# Altium PCB PCBtest.PcbDoc
Units mil, origin at the board's own origin, x right, y up, seen from the top; angles counter-clockwise.
Board outline 6000 x 4000 mil, 2 copper layers (Top Layer, Bottom Layer), stack 61.756 mil thick; 78 components, 57 nets, 251 pads, 0 vias.
Unrouted connection lines stored in the file: 157.
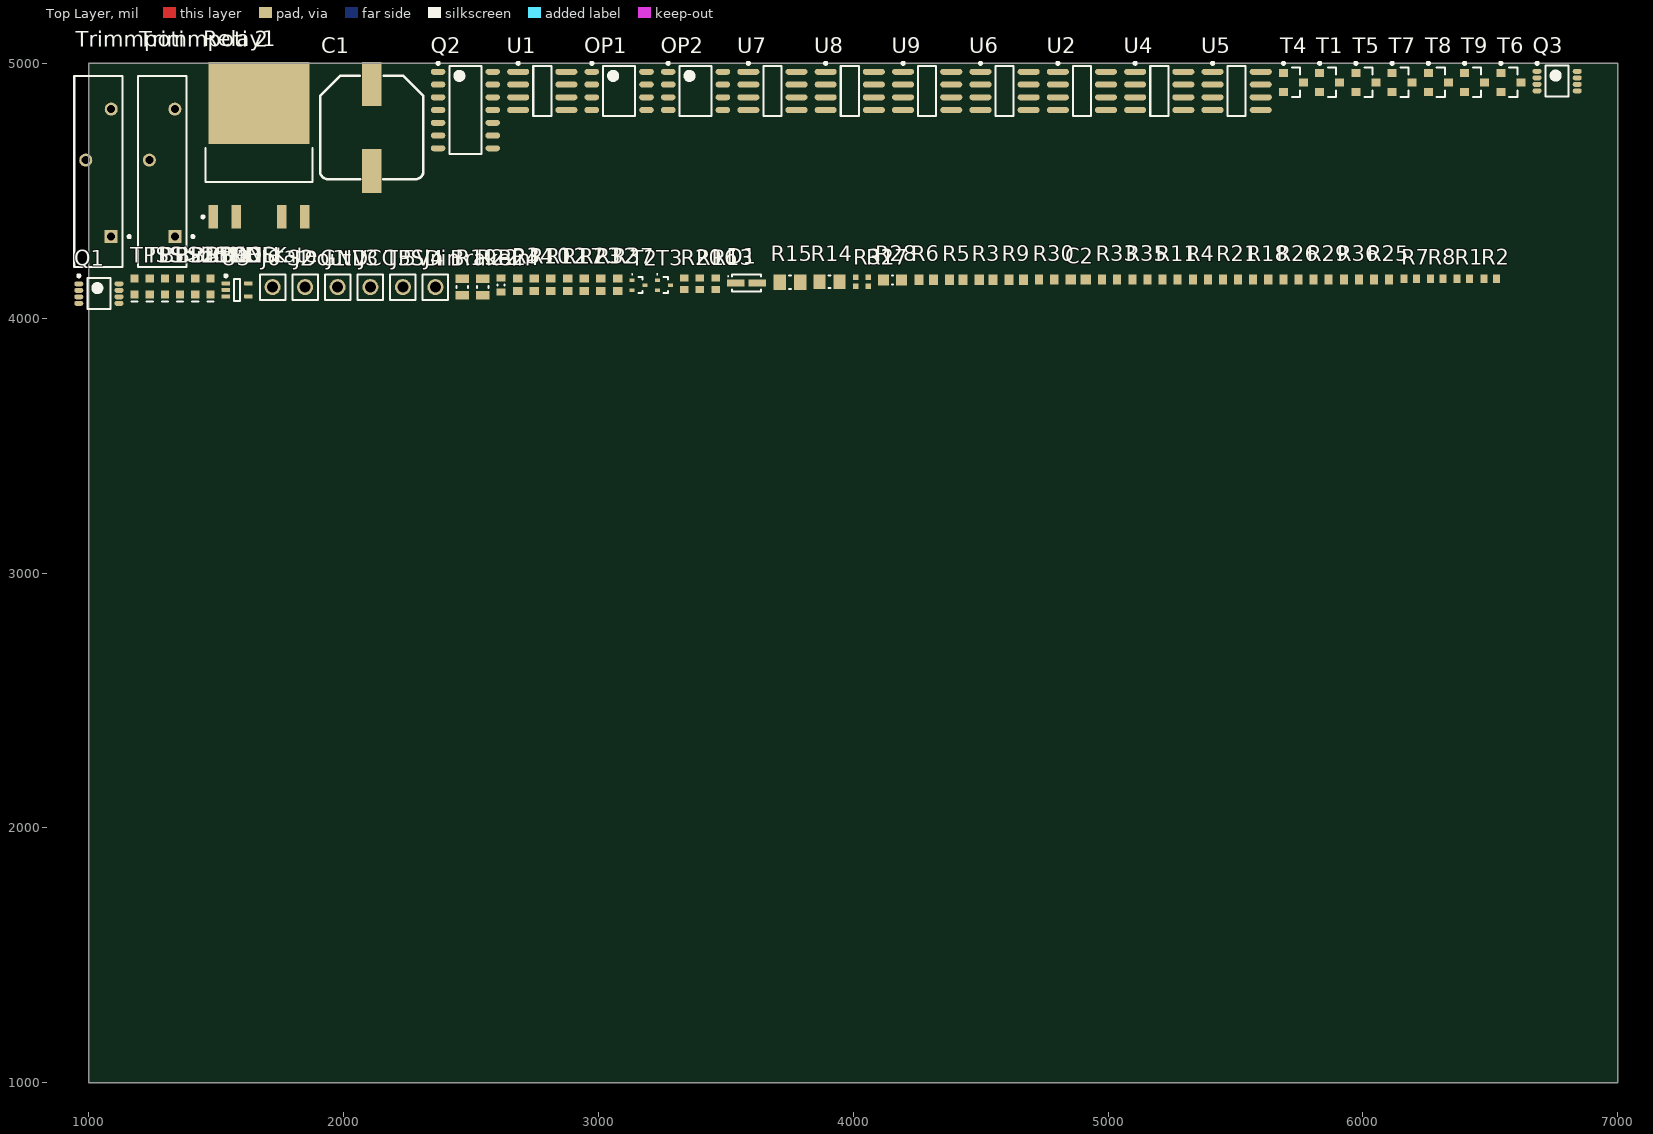
[diagram p0: Top Layer view]
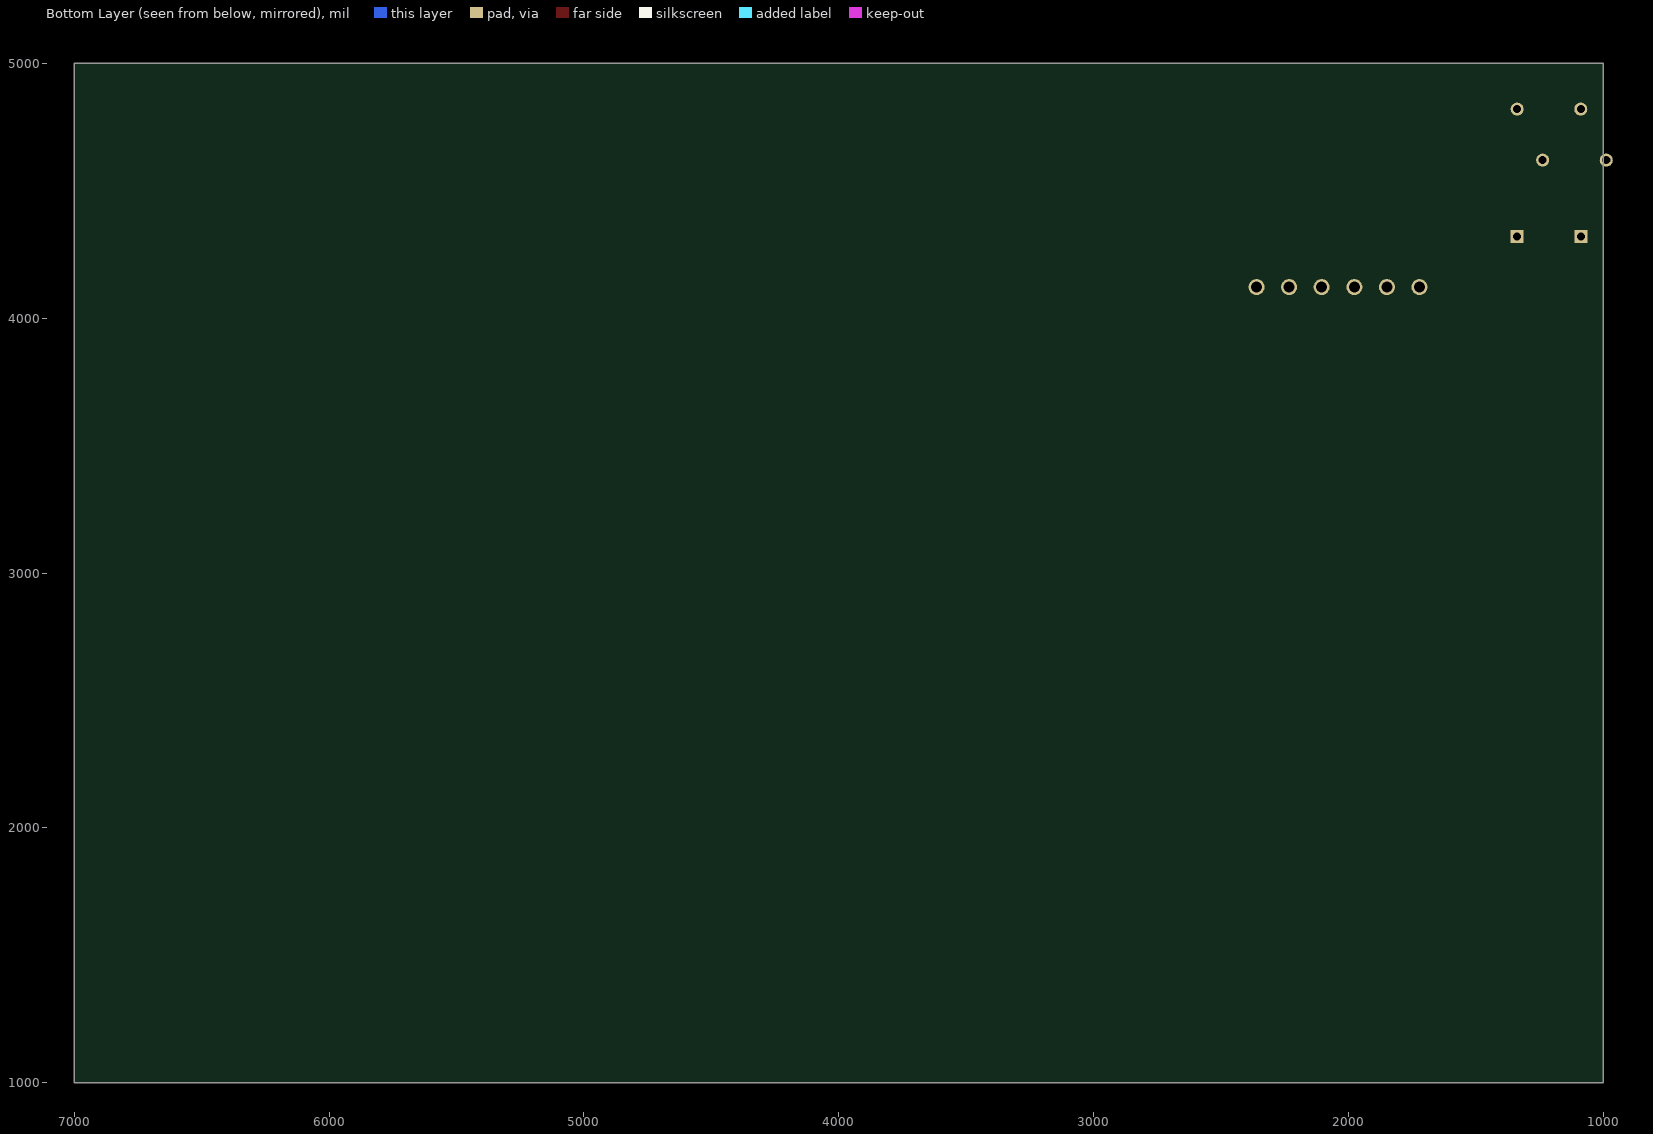
[diagram p1: Bottom Layer view, seen from below]

## Layer stack, top to bottom
Top Solder: solder mask 1, SM-001, Dk 4
Top Layer: signal copper 1.378
Dielectric 1: core 59, Core-043, Dk 4.3
Bottom Layer: signal copper 1.378
Bottom Solder: solder mask 1, SM-001, Dk 4

## Board outline
1000,1000 7000,1000 7000,5000 1000,5000

## Design rules (kind name [scope] priority, off if disabled: settings)
Clearance [All] p1: gap=10 ignorepadtopadclearanceinfootprint=FALSE except(0: Arc-Hole Track-Hole SMDPad-Hole THPad-Hole Via-Hole Fill-Hole Poly-Hole Region-Hole Text-Hole)
PolygonConnect [All] p1: connectstyle=Relief reliefconductorwidth=10 reliefentries=4 polygonreliefangle="90 Angle" airgapwidth=10
RoomDefinition Sheet1 [InComponentClass('Sheet1')] p1: confinementstyle=ConfineIn formatcopy=TRUE lockcomponents=FALSE outline 930,935 7050,935 7050,5030 930,5030
RoutingVias [All] p1: holewidth=28 width=50 viastyle="Through Hole" minholewidth=28 minwidth=50 maxholewidth=28 maxwidth=50
SolderMaskExpansion [All] p1: expansion=4 istentingtop=FALSE
Width [All] p1: maxlimit=10 minlimit=10 preferedwidth=10
30 further rules are at their usual default settings.

## Components (designator, comment, footprint, x,y, rotation, side; value= is the part's Value field where it differs from the comment)
BP>30B "150060GS75000" 0603_A 1359.15,4124.97 r90 top
BPShrtGND "150060RS75000" 0603_A 1299.65,4124.97 r90 top
BSPDCLK "150060BS75000" 0603_A 1418.65,4124.97 r90 top
BSPDState "150060GS75000" 0603_A 1478.14,4124.97 r90 top
C1 "875075561006" WCAP-PSLC_10x12.4 2111.1,4748.13 r90 top value=150uF
C2 "C0603C335M9PACTU" CAPC1608X90X35NL15T15 4882.97,4152.53 r0 top
D1 "BAT46WH" DIOM2715X18N 3581.86,4138.82 r0 top
"J1 VCC 5V" "61300111121" 61300111121 1977.62,4122.28 r90 top
"J2 GND" "61300111121" 61300111121 1849.75,4122.28 r90 top
"J3 TPSin" "61300111121" 61300111121 2105.5,4122.28 r90 top
"J4 BrakeIn" "61300111121" 61300111121 2361.24,4122.28 r90 top
J5SDin "61300111121" 61300111121 2233.37,4122.28 r90 top
"J6 SDout" "61300111121" 61300111121 1721.87,4122.28 r90 top
OP1 "AD711" "SOIC8; SOIC127P600X175-8N" 3081.93,4891.69 r0 top
OP2 "AD711" "SOIC8; SOIC127P600X175-8N" 3381.58,4891.69 r0 top
Q1 "Dual 2 input AND gate" "TSSOP8; TSOP65P400X110-8N" 1040.46,4096.49 r0 top
Q2 "Triple Input OR Gate" "SOIC14; SOIC127P600X175-14N" 2478.68,4816.69 r0 top
Q3 "74LVC1G74" "TSSOP8; TSOP65P400X110-8N" 6762.21,4930.28 r0 top
R1 "ERJ-3EKF1022V" RESC1608X55X30LL15T15 6394.6,4155.48 r0 top
R2 "ERJ-3EKF4753V" RESC1608X55X30LL15T15 6499.38,4155.48 r0 top
R3 "CRCW060325K5FKEA" RESC1609X50X30ML10T20 4521.41,4151.55 r0 top
R4 "RC0603FR-0710KL" RESC1608X55X25ML10T15 5362.09,4152.53 r0 top
R5 "CRCW0603402KFKEA" RESC1609X50X30ML10T20 4404.83,4151.55 r0 top
R6 "ERJ-3EKF2433V" RESC1608X55X30ML15T15 4286.27,4151.55 r0 top
R7 "ERJ-3EKF1022V" RESC1608X55X30LL15T15 6185.06,4155.48 r0 top
R8 "ERJ-3EKF4753V" RESC1608X55X30LL15T15 6289.83,4155.48 r0 top
R9 "ERJ-3EKF2433V" RESC1608X55X30ML15T15 4639.96,4151.55 r0 top
R10 "CRCW060313K0FKEA" RESC1609X50X30NL10T20 2749.02,4131.86 r90 top
R11 "RC0603FR-0710KL" RESC1608X55X25ML10T15 5243.54,4152.53 r0 top
R12 "CRCW0603249KFKEA" RESC1609X50X30NL10T20 2814.42,4131.86 r90 top
R13 "CRCW060330K0FKEA" RESC1609X50X30LL10T20 3460.35,4135.8 r90 top
R14 "RC0805FR-071KL" RESC2013X60X35ML10T20 3907.54,4143.67 r0 top
R15 "CRCW0805510KFKEA" RESC2013X50X30ML20T20 3751.59,4141.7 r0 top
R16 "CRCW060397K6FKEA" RESC1609X50X30LL10T20 3398.89,4135.8 r90 top
R17 "CRCW0603499KFKEA" RESC1609X50X30NL10T20 2879.82,4131.86 r90 top
R18 "RC0603FR-07100KL" RESC1608X55X25ML10T15 5599.2,4152.53 r0 top
R19 "CRCW0805100RFKEA" RESC2013X50X30LL20T20 2465.76,4123 r90 top
R20 "CRCW060397K6FKEA" RESC1609X50X30LL10T20 3337.42,4135.8 r90 top
R21 "RC0603FR-07100KL" RESC1608X55X25ML10T15 5480.64,4152.53 r0 top
R22 "CRCW0805100RFKEA" RESC2013X50X30LL20T20 2546.91,4123 r90 top
R23 "CRCW0603499KFKEA" RESC1609X50X30NL10T20 2945.22,4131.86 r90 top
R24 "51K1 1% 0603(1608)" RESC0603(1608)_L 2619.2,4130.88 r90 top value="51100.00 Ohm"
R25 "RC0603FR-07100KL" RESC1608X55X25ML10T15 6073.4,4152.53 r0 top
R26 "RC0603FR-0710KL" RESC1608X55X25ML10T15 5717.75,4152.53 r0 top
R27 "ERJ-2RKF1243X" RESC1005X40X25NL05T05 4059.02,4143.67 r90 top
R28 "118K 1% 0603(1608)" RESC0603(1608)_M 4154.93,4150.56 r0 top value="118000.00 Ohm"
R29 "RC0603FR-07100KL" RESC1608X55X25ML10T15 5836.3,4152.53 r0 top
R30 "RC0603FR-0710KL" RESC1608X55X25ML10T15 4759.5,4152.53 r0 top
R31 "ERJ-2RKF1243X" RESC1005X40X25NL05T05 4009.36,4143.67 r90 top
R32 "CRCW0603130KFKEA" RESC1609X50X30NL10T20 3010.62,4131.86 r90 top
R33 "RC0603FR-07100RL" RESC1608X55X25ML10T15 5006.44,4152.53 r0 top
R34 "CRCW0603130KFKEA" RESC1609X50X30NL10T20 2683.61,4131.86 r90 top
R35 "RC0603FR-07100RL" RESC1608X55X25ML10T15 5124.99,4152.53 r0 top
R36 "RC0603FR-07100RL" RESC1608X55X25ML10T15 5954.85,4152.53 r0 top
R37 "CRCW0603130KFKEA" RESC1609X50X30NL10T20 3076.02,4131.86 r90 top
Relay1 "AUIR3313S" "D2PAK5 ;DPAK228P1524X483-5N" 1668.78,4679.23 r90 top
T1 "BC848BLT1G" ONSC-SOT-23-3-318-08_V 5869.8,4925.35 r0 top
T2 "MMBT3906TT1G" ONSC-SC-75-3-463-01_V 3158.22,4129.84 r0 top
T3 "MMBT3906TT1G" ONSC-SC-75-3-463-01_V 3257.2,4129.84 r0 top
T4 "BC848BLT1G" ONSC-SOT-23-3-318-08_V 5727.63,4925.35 r0 top
T5 "BC848BLT1G" ONSC-SOT-23-3-318-08_V 6011.98,4925.35 r0 top
T6 "BC848BLT1G" ONSC-SOT-23-3-318-08_V 6580.67,4925.35 r0 top
T7 "BC848BLT1G" ONSC-SOT-23-3-318-08_V 6154.15,4925.35 r0 top
T8 "BC848BLT1G" ONSC-SOT-23-3-318-08_V 6296.32,4925.35 r0 top
T9 "BC848BLT1G" ONSC-SOT-23-3-318-08_V 6438.5,4925.35 r0 top
TPS>25% "150060GS75000" 0603_A 1240.16,4124.97 r90 top
TPSShrtGND "150060RS75000" 0603_A 1180.66,4124.97 r90 top
Trimmpoti "3006P-1-104ZLF" BOUR-3006P-3_V 1039.02,4575.15 r90 top
"Trimmpoti 2" "3006P-1-104ZLF" BOUR-3006P-3_V 1288.54,4575.15 r90 top
U1 "LT1017IS8#PBF" LT-S8_N 2780.31,4891.69 r0 top
U2 "LT1017IS8#PBF" LT-S8_N 4897.57,4891.69 r0 top
U3 "Inverter SN74LVC1G04DCKR" DCK0005A_N 1582.91,4111.26 r0 top
U4 "LT1017IS8#PBF" LT-S8_N 5201.16,4891.69 r0 top
U5 "LT1017IS8#PBF" LT-S8_N 5504.75,4891.69 r0 top
U6 "LT1017IS8#PBF" LT-S8_N 4593.98,4891.69 r0 top
U7 "LT1017IS8#PBF" LT-S8_N 3683.2,4891.69 r0 top
U8 "LT1017IS8#PBF" LT-S8_N 3986.8,4891.69 r0 top
U9 "LT1017IS8#PBF" LT-S8_N 4290.39,4891.69 r0 top

## Footprints (in the part's own frame and the unit in brackets; to place one, negate y for a bottom-side part, rotate by r counter-clockwise, add the part's x,y. Pads: shape width x height; smd on the part's side, far side on the other; paste and mask are expansions set on the pad)
0603_A [mm] "Chip LED, 2-Leads, Body 1.6x0.8mm, IPC Medium Density"
  rect 0.8x0.8 smd: 1(-0.8,0) 2(0.8,0)
  silkscreen extent -1.5,-0.3 -1.5,0.3, body extent -0.8,-0.4 0.8,0.4, height 0.7
61300111121 [mm] "1pins, 1 row, straight, gold plating"
  round 1.6 hole 1.1: 1(0,0)
  silkscreen extent -1.27,-1.27 1.27,1.27, body extent -1.27,-1.27 1.27,1.27, height 8.57
BOUR-3006P-3_V [mm] "THD, 3-Leads, Body 19.05x4.83mm, Height 6.6mm"
  rect 1.3x1.3 hole 0.8: 1(-6.475,-1.27)
  round 1.3 hole 0.8: 2(1.145,1.27) 3(6.225,-1.27)
  silkscreen extent -9.53,-3.19 9.53,2.41, body extent -9.53,-2.41 11.05,2.41, height 6.6
CAPC1608X90X35NL15T15 [mm] "Chip Capacitor, 2-Leads, Body 1.60x0.81mm, IPC Medium Density"
  rect 1.05x1 smd: 1(-0.75,0) 2(0.75,0)
  body extent -0.88,-0.48 0.87,0.48, height 0.9
"D2PAK5 ;DPAK228P1524X483-5N" [mm] "D2-PAK, 5-Pads, Body 7,93x8,70mm (max), IPC Medium Density"
  rect 2.35x0.95 smd: 1(-7.15,4.56) 2(-7.15,2.28) 4(-7.15,-2.28) 5(-7.15,-4.56)
  rect 8.2x10.1 smd: 3(4.2,0)
  silkscreen extent -7.27,-5.35 -0.3,5.71, body extent -7.51,-5.33 7.74,5.33, height 4.83
DCK0005A_N [mm] "SOT23, 5-Leads, Body 2.15x1.4mm, Pitch 0.65mm, IPC Medium Density"
  rrect25% 0.85x0.4 smd: 1(-1.125,0.65) 2(-1.125,0) 3(-1.125,-0.65) 4(1.125,-0.65) 5(1.125,0.65)
  silkscreen extent -1.25,-1.1 0.3,1.52, body extent -1.14,-1 1.14,1, height 0.94
DIOM2715X18N [mm] "Molded Diode, 2-Leads, Body 2,70x1,55mm, IPC Medium Density"
  rect 1.75x0.7 smd: 1(-1.075,0) 2(1.075,0)
  silkscreen extent -1.9,-0.85 1.45,0.85, body extent -1.65,-0.85 1.65,0.85, height 1.8
LT-S8_N [mm] "SOP, 8-Leads, Body 4.9x3.9mm, Pitch 1.27mm, IPC Medium Density"
  oval 2.2x0.6 smd: 1(-2.4,1.905) 2(-2.4,0.635) 3(-2.4,-0.635) 4(-2.4,-1.905) 5(2.4,-1.905) 6(2.4,-0.635) 7(2.4,0.635) 8(2.4,1.905)
  silkscreen extent -2.52,-2.5 0.9,2.88, body extent -2,-2.5 2,2.5, height 1.76
ONSC-SC-75-3-463-01_V [mil] "SOT23, 3-Leads, Body 1.6x0.8mm, Pitch 0.5mm"
  rect 20x14.02 smd: 1(-25.49,19.68) 2(-25.49,-19.69) 3(25.49,0)
  silkscreen extent -27,-31 16,44, body extent -16,-31 16,31, height 35
ONSC-SOT-23-3-318-08_V [mm] "SOT23, 3-Leads, Body 2.92x1.3mm, Pitch 0.95mm"
  rect 0.9x0.8 smd: 1(-1,0.95) 2(-1,-0.95) 3(1,0)
  silkscreen extent -1.12,-1.46 0.65,2.02, body extent -0.65,-1.46 0.65,1.46, height 1.11
RESC0603(1608)_L [mm] "Chip Resistor, Body 1.6x0.8mm, IPC High Density"
  rect 0.7x0.9 smd: 1(-0.7,0) 2(0.7,0)
  silkscreen extent -0.05,-0.35 0.05,0.35, body extent -0.85,-0.47 0.85,0.47, height 0.6
RESC0603(1608)_M [mm] "Chip Resistor, Body 1.6x0.8mm, IPC Low Density"
  rect 1.1x1.1 smd: 1(-0.9,0) 2(0.9,0)
  silkscreen extent -0.05,-0.45 0.05,0.45, body extent -0.85,-0.47 0.85,0.47, height 0.6
RESC1005X40X25NL05T05 [mm] "Chip Resistor, 2-Leads, Body 1.00x0.50mm, IPC Medium Density"
  rect 0.55x0.55 smd: 1(-0.45,0) 2(0.45,0)
  body extent -0.53,-0.27 0.53,0.28, height 0.4
RESC1608X55X25ML10T15 [mm] "Chip Resistor, 2-Leads, Body 1.60x0.80mm, IPC Low Density"
  rect 0.8x1 smd: 1(-0.75,0) 2(0.75,0)
  body extent -0.85,-0.45 0.85,0.45, height 0.55
RESC1608X55X30LL15T15 [mm] "Chip Resistor, 2-Leads, Body 1.60x0.80mm, IPC High Density"
  rect 0.7x0.85 smd: 1(-0.625,0) 2(0.625,0)
  body extent -0.87,-0.48 0.87,0.48, height 0.55
RESC1608X55X30ML15T15 [mm] "Chip Resistor, 2-Leads, Body 1.60x0.80mm, IPC Low Density"
  rect 0.9x1.05 smd: 1(-0.725,0) 2(0.725,0)
  body extent -0.87,-0.48 0.87,0.48, height 0.55
RESC1609X50X30LL10T20 [mm] "Chip Resistor, 2-Leads, Body 1.55x0.85mm, IPC High Density"
  rect 0.7x0.85 smd: 1(-0.575,0) 2(0.575,0)
  body extent -0.82,-0.48 0.82,0.48, height 0.5
RESC1609X50X30ML10T20 [mm] "Chip Resistor, 2-Leads, Body 1.55x0.85mm, IPC Low Density"
  rect 0.9x1.05 smd: 1(-0.675,0) 2(0.675,0)
  body extent -0.82,-0.48 0.82,0.48, height 0.5
RESC1609X50X30NL10T20 [mm] "Chip Resistor, 2-Leads, Body 1.55x0.85mm, IPC Medium Density"
  rect 0.8x0.95 smd: 1(-0.625,0) 2(0.625,0)
  body extent -0.82,-0.48 0.82,0.48, height 0.5
RESC2013X50X30LL20T20 [mm] "Chip Resistor, 2-Leads, Body 2.00x1.25mm, IPC High Density"
  rect 0.85x1.35 smd: 1(-0.825,0) 2(0.825,0)
  silkscreen extent -0.1,-0.58 0.1,0.58, body extent -1.1,-0.72 1.1,0.72, height 0.5
RESC2013X50X30ML20T20 [mm] "Chip Resistor, 2-Leads, Body 2.00x1.25mm, IPC Low Density"
  rect 1.25x1.55 smd: 1(-1.025,0) 2(1.025,0)
  silkscreen extent -0.1,-0.67 0.1,0.67, body extent -1.1,-0.72 1.1,0.72, height 0.5
RESC2013X60X35ML10T20 [mm] "Chip Resistor, 2-Leads, Body 2.1x1.35mm, IPC Low Density"
  rect 1.2x1.45 smd: 1(-1,0) 2(1,0)
  silkscreen extent -0.1,-0.63 0.1,0.63, body extent -1.05,-0.68 1.05,0.67, height 0.6
"SOIC8; SOIC127P600X175-8N" [mm] "SOIC, 8-Leads, Body 4,90x3,90mm, Pitch 1,27mm, IPC Medium Density"
  oval 1.45x0.6 smd: 1(-2.725,1.905) 2(-2.725,0.635) 3(-2.725,-0.635) 4(-2.725,-1.905) 5(2.725,-1.905) 6(2.725,-0.635) 7(2.725,0.635) 8(2.725,1.905)
  silkscreen extent -2.85,-2.5 1.6,2.88, body extent -2,-2.5 2,2.5, height 1.75
"SOIC14; SOIC127P600X175-14N" [mm] "SOIC, 14-Leads, Body 8,65x3,90mm, Pitch 1,27mm, IPC Medium Density"
  oval 1.45x0.6 smd: 1(-2.725,3.81) 2(-2.725,2.54) 3(-2.725,1.27) 4(-2.725,0) 5(-2.725,-1.27) 6(-2.725,-2.54) 7(-2.725,-3.81) 8(2.725,-3.81) 9(2.725,-2.54) 10(2.725,-1.27) 11(2.725,0) 12(2.725,1.27) 13(2.725,2.54) 14(2.725,3.81)
  silkscreen extent -2.85,-4.4 1.6,4.78, body extent -3,-4.4 3,4.4, height 1.75
"TSSOP8; TSOP65P400X110-8N" [mm] "TSOP, 8-Leads, Body 3,00x3,00mm, Pitch 0,65mm, IPC Medium Density"
  oval 0.9x0.5 smd: 1(-2,0.975) 2(-2,0.325) 3(-2,-0.325) 4(-2,-0.975) 5(2,-0.975) 6(2,-0.325) 7(2,0.325) 8(2,0.975)
  silkscreen extent -2.12,-1.55 1.15,1.9, body extent -1.55,-1.55 1.55,1.55, height 1.1
WCAP-PSLC_10x12.4 [mm] "Aluminium Polymer V-Chip SMT Capacitors, §¶10x12.4mm"
  rect 4.4x1.9 smd: 1(4.35,0) 2(-4.35,0)
  silkscreen extent -5.15,-5.15 5.15,5.15, body extent -5.5,-5.15 5.5,5.15, height 12.4

## Part data
BP>30B BSPDState TPS>25%: library part CMP-1426-00002-1, "SMD mono-color Chip LED, WL-SMCW, Green", Color=Green, Manufacturer="Wuerth Elektronik", ComponentLink1Description="Manufacturer URL", ComponentLink1URL=http://www.we-online.com, ComponentLink2Description=Datasheet, ComponentLink2URL=http://katalog.we-online.com/led/datasheet/150060GS75000.pdf, PackageReference=0603_A, PartNumber=150060GS75000
BPShrtGND TPSShrtGND: library part CMP-1426-00001-1, "SMD mono-color Chip LED, WL-SMCW, Red", Color=Red, Manufacturer="Wuerth Elektronik", ComponentLink1Description="Manufacturer URL", ComponentLink1URL=http://www.we-online.com, ComponentLink2Description=Datasheet, ComponentLink2URL=http://katalog.we-online.com/led/datasheet/150060RS75000.pdf, PackageReference=0603_A, PartNumber=150060RS75000
BSPDCLK: library part CMP-1426-00003-1, "SMD mono-color Chip LED, WL-SMCW, Blue", Color=Blue, Manufacturer="Wuerth Elektronik", ComponentLink1Description="Manufacturer URL", ComponentLink1URL=http://www.we-online.com, ComponentLink2Description=Datasheet, ComponentLink2URL=http://katalog.we-online.com/led/datasheet/150060BS75000.pdf, PackageReference=0603_A, PartNumber=150060BS75000
C1: "WCAP-PSLC Aluminum Polymer Capacitors, size Ф10x12.4mm, 25V DC, 150uF", Operating Temperature="-55 °C up to +105 °C", Rated Voltage="25V DC", ComponentLink1Description=Manufacturer, ComponentLink1URL=http://www.we-online.de, ComponentLink2Description=Datasheet, ComponentLink2URL=http://katalog.we-online.de/pbs/datasheet/875075561006.pdf, Life Cycle=2000h, Part Number=875075561006, Published Date="June 2017", Publisher="Wurth Elektronik", Size=Ф10x12.4mm
C2: library part CMP-2006-02261-1, Manufacturer=Kemet, Part Number=C0603C335M9PACTU
"J1 VCC 5V" "J2 GND" "J3 TPSin" "J4 BrakeIn" J5SDin "J6 SDout": "WR-PHD 2.54 mm THT Pin Header, 1p", Rated Current="3 A", Withstanding Voltage="500 VAC", Working Voltage="250 VAC", ComponentLink1Description=Manufacturer, ComponentLink1URL=http://www.we-online.de, ComponentLink2Description=Datasheet, ComponentLink2URL=http://katalog.we-online.de/em/datasheet/6130xx11121.pdf, Part Number=61300111121, Pin Number=1, Pitch="2.54 mm", Published Date="Aug 2017", Publisher="Wurth Elektronik"
OP1 OP2: Supplier Part Number 1=584-AD711JRZ, Supplier 1=Mouser
Q1: library part 74LVC2G08-Q100, Supplier Part Number 1=771-74LVC2G08DP-G, Supplier 1=Mouser
Q2: library part 74HCT4075D,653, Supplier Part Number 1=771-74HCT4075D-T, Supplier 1=Mouser
Q3: Supplier Part Number 1=771-LVC1GDP125, Supplier 1=Mouser
R1 R7: library part CMP-2000-00185-1, Manufacturer=Panasonic, Part Number=ERJ-3EKF1022V
R2 R8: library part CMP-2000-00528-1, Manufacturer=Panasonic, Part Number=ERJ-3EKF4753V
R3: library part CMP-2000-03129-1, Manufacturer="Vishay Dale", Part Number=CRCW060325K5FKEA
R4 R11 R26 R30: library part CMP-2100-03664-1, "Chip Resistor, 10 KOhm, +/- 1%, 01 W, -55 to 155 degC, 0603 (1608 Metric), RoHS, Tape and Reel", Case Code (Imperial)=0603, Case Code (Metric)=1608, Manufacturer=Yageo, Max Operating Temperature=155degC, Min Operating Temperature=-55degC, Package Description="2-Pin Surface Mount Device, Body 1.6 x 0.8 mm", Power Rating=100mW, Resistance=10KOhm, Temperature Coefficient=100ppm/degreesC, Tolerance=1%, Voltage Rating=75V, Voltage Rating (DC)=50V, Case/Package=0603, Composition=ThickFilm, Datasheet URL=http://www.yageo.com/NewPortal/yageodocoutput?fileName=/pdf/R-Chip/PYu-RC_Group_51_RoHS_L_5.pdf, Datasheet Version="Rev. 5, 10/2016", Depth=0.8mm, Height=0.45mm, Lead Free=LeadFree, Lead Pitch=0.3mm, Length=1.6mm, Manufacturer URL=http://www.yageo.com/, Military Standard=Not, Number of Pins=2, Package Reference=0603, Packaging=TapeandReel, REACH SVHC=NoSVHC, RoHSCompliant=true, Termination=SMD/SMT, Weight=7.1E-05oz, Width=0.8mm
R5: library part CMP-2000-03334-1, Manufacturer="Vishay Dale", Part Number=CRCW0603402KFKEA
R6 R9: library part CMP-2000-00367-1, Manufacturer=Panasonic, Part Number=ERJ-3EKF2433V
R10: library part CMP-2000-03895-1, Manufacturer="Vishay Dale", Part Number=CRCW060313K0FKEA
R12: library part CMP-2000-03115-1, Manufacturer="Vishay Dale", Part Number=CRCW0603249KFKEA
R13: library part CMP-2000-03223-1, Manufacturer="Vishay Dale", Part Number=CRCW060330K0FKEA
R14: library part CMP-2100-03671-1, "Chip Resistor, 1 KOhm, +/- 1%, 125 mW, -55 to 155 degC, 0805 (2012 Metric), RoHS, Tape and Reel", Case Code (Imperial)=0805, Case Code (Metric)=2012, Manufacturer=Yageo, Max Operating Temperature=155degC, Max Power Dissipation=125mW, Min Operating Temperature=-55degC, Package Description="2-Pin Surface Mounted Device, Body 2 x 1.25 mm", Package Quantity=1, Resistance=1KOhm, Temperature Coefficient=100ppm/degreesC, Tolerance=1%, Voltage Rating=150V, Case/Package=0805, Composition=ThickFilm, Datasheet URL=http://www.yageo.com/NewPortal/yageodocoutput?fileName=/pdf/R-Chip/PYu-RC_Group_51_RoHS_L_5.pdf, Datasheet Version="Rev. 5, 10/2016", Depth=1.25mm, Height=0.024inch, Lead Free=LeadFree, Length=0.079inch, Manufacturer URL=http://www.yageo.com/, Military Standard=Not, Number of Pins=2, Number of Terminations=2, Package Reference=0805, Packaging=TapeandReel, Power Rating=125mW, REACH SVHC=Unknown, RoHSCompliant=true, Termination=SMD/SMT, Voltage Rating (DC)=150V, Width=0.049inch
R15: library part CMP-2001-03987-1, Manufacturer="Vishay Dale", Part Number=CRCW0805510KFKEA
R16 R20: library part CMP-2000-03650-1, Manufacturer="Vishay Dale", Part Number=CRCW060397K6FKEA
R17 R23: library part CMP-2000-03389-1, Manufacturer="Vishay Dale", Part Number=CRCW0603499KFKEA
R18 R21 R25 R29: library part CMP-2100-03662-1, "Chip Resistor, 100 KOhm, +/- 1%, 0.1 W, -55 to 155 degC, 0603 (1608 Metric), RoHS, Tape and Reel", Case Code (Imperial)=0603, Case Code (Metric)=1608, Manufacturer=Yageo, Max Operating Temperature=155degC, Min Operating Temperature=-55degC, Package Description="2-Pin Surface Mount Device, Body 1.6 x 0.8 mm", Power Rating=100mW, Resistance=100KOhm, Temperature Coefficient=100ppm/degreesC, Tolerance=1%, Voltage Rating=50V, Case/Package=0603, Composition=ThickFilm, Datasheet URL=http://www.yageo.com/NewPortal/yageodocoutput?fileName=/pdf/R-Chip/PYu-RC_Group_51_RoHS_L_5.pdf, Datasheet Version="Rev. 5, 10/2016", Depth=0.8mm, Height=0.45mm, Lead Free=LeadFree, Length=1.6mm, Manufacturer URL=http://www.yageo.com/, Military Standard=Not, Number of Pins=2, Package Reference=0603, Packaging=TapeandReel, REACH SVHC=NoSVHC, RoHSCompliant=true, Termination=SMD/SMT, Voltage Rating (DC)=50V, Width=0.8mm
R19 R22: library part CMP-2001-04901-1, Manufacturer="Vishay Dale", Part Number=CRCW0805100RFKEA
R24: library part CMP-1012-00704-1, "51K1 0.1W 1% 0603 (1608 Metric)  SMD", Case-EIA=0603, Case-Metric=1608, Power="0.1 W", Tolerance="1 %", Technology=SMT
R27 R31: library part CMP-2002-00654-1, Manufacturer=Panasonic, Part Number=ERJ-2RKF1243X
R28: library part CMP-1012-00743-1, "118K 0.1W 1% 0603 (1608 Metric)  SMD", Case-EIA=0603, Case-Metric=1608, Power="0.1 W", Tolerance="1 %", Technology=SMT
R32 R34 R37: library part CMP-2000-03887-1, Manufacturer="Vishay Dale", Part Number=CRCW0603130KFKEA
R33 R35 R36: library part CMP-2100-03663-1, "Chip Resistor, 100 Ohm, +/- 1%, 0.1 W, -55 to 155 degC, 0603 (1608 Metric), RoHS, Tape and Reel", Case Code (Imperial)=0603, Case Code (Metric)=1608, Manufacturer=Yageo, Max Operating Temperature=155degC, Min Operating Temperature=-55degC, Package Description="2-Pin Surface Mount Device, Body 1.6 x 0.8 mm", Power Rating=100mW, Resistance=100Ohm, Temperature Coefficient=100ppm/degreesC, Tolerance=1%, Voltage Rating=50V, Case/Package=0603, Composition=ThickFilm, Datasheet URL=http://www.yageo.com/NewPortal/yageodocoutput?fileName=/pdf/R-Chip/PYu-RC_Group_51_RoHS_L_5.pdf, Datasheet Version="Rev. 5, 10/2016", Depth=0.8mm, Height=0.45mm, Lead Free=LeadFree, Length=1.6mm, Manufacturer URL=http://www.yageo.com/, Military Standard=Not, Number of Pins=2, Package Reference=0603, Packaging=TapeandReel, REACH SVHC=Unknown, RoHSCompliant=true, Termination=SMD/SMT, Voltage Rating (DC)=50V, Width=0.8mm
T1 T4 T5 T6 T7 T8 T9: library part CMP-1048-00679-1, "General Purpose Transistor, NPN Silicon, 3-Pin SOT-23, Pb-Free, Tape and Reel", Manufacturer="On Semiconductor", ComponentLink1Description="Manufacturer URL", ComponentLink1URL=http://www.onsemi.com/, ComponentLink2Description=Datasheet, ComponentLink2URL=http://www.onsemi.cn/pub_link/Collateral/BC846ALT1-D.PDF, ComponentLink3Description="Package Specification", ComponentLink3URL=http://www.onsemi.cn/pub_link/Collateral/318-08.PDF, DatasheetVersion="Rev. 11", fT Min (MHz)=100, IC Continuous (A)=0.1, Mounting Technology="Surface Mount", PackageDescription="3-Pin Small Outline Transistor, Body 2.92 x 1.3 mm, Pitch 0.95 mm", PackageReference=SOT-23-3-318-08, PackageVersion="Rev. AP, 11/2009", Packing="Tape and Reel", PartNumber=BC848BLT1G, Polarity=NPN, RoHS=TRUE
T2 T3: library part CMP-1048-00413-1, "General Purpose Transistor, PNP Silicon, 3-Pin SC-75, Pb-Free, Tape and Reel", Manufacturer="On Semiconductor", ComponentLink1Description="Manufacturer URL", ComponentLink1URL=http://www.onsemi.com/, ComponentLink2Description=Datasheet, ComponentLink2URL=http://www.onsemi.cn/pub_link/Collateral/MMBT3906TT1-D.PDF, ComponentLink3Description="Package Specification", ComponentLink3URL=http://www.onsemi.com/pub_link/Collateral/463-01.PDF, DatasheetVersion="Rev. 1", fT Min (MHz)=250, IC Continuous (A)=-0.2, Mounting Technology="Surface Mount", PackageDescription="3-Pin Small Outline Transistor, Body 1.6 x 0.8 mm, Pitch 0.5 mm", PackageReference=SC-75-3-463-01, PackageVersion="Rev. F, 07/2005", Packing="Tape and Reel", PartNumber=MMBT3906TT1G, Polarity=PNP, RoHS=TRUE
Trimmpoti "Trimmpoti 2": library part CMP-0975-00010-1, "Trimming Potentiometer, 100K Ohm +/- 10%, -55 to 125 degC, 3-Pin 19.05 x 4.83 x 6.6 mm THD, RoHS", Manufacturer=Bourns, Resistance (kOhm)=100, Resistance Tolerance="+/- 10%", Temperature Range="-55 to 125 degC", ComponentLink1Description="Manufacturer URL", ComponentLink1URL=http://www.bourns.com/, ComponentLink2Description=Datasheet, ComponentLink2URL=http://www.bourns.com/data/global/pdfs/3006.pdf, ComponentLink3Description="Package Specification", ComponentLink3URL=http://www.bourns.com/data/global/pdfs/3006.pdf, DatasheetVersion=Apr-14, Mounting Technology="Through Hole", Number of Turns=15, PackageDescription="3-Pin THD, Body 19.05 x 4.83 mm, Height 6.6 mm", PackageReference=3006P-3, PackageVersion=Apr-14, PartNumber=3006P-1-104ZLF, RoHS=TRUE, Rotational Life="200 Cycles"
U1 U2 U4 U5 U6 U7 U8 U9: library part CMP-0360-00547-2, "Micropower Comparator, 2 Channels, 1.2 to 40 V, -40 to +85 degC, 8-pin SOP (S8)", Generic Part Number=LT1017, Manufacturer="Linear Technology", Supply Current (uA) Guaranteed=60, Supply Current (uA) Typical=30, Supply Voltage Range="1.2 to 40 V", Channels (#)=2, ComponentLink1Description="Manufacturer URL", ComponentLink1URL=http://www.linear.com/, ComponentLink2Description=Datasheet, ComponentLink2URL=http://cds.linear.com/docs/en/datasheet/10178ff.pdf, ComponentLink3Description="Package Specification", ComponentLink3URL=http://cds.linear.com/docs/en/packaging/05081610_G_SO8.pdf, DatasheetVersion="Rev F", Features=Comparator, Mounting Technology="Surface Mount", PackageDescription="8-Pin Plastic Small Outline (Narrow .150 Inch), Body 4.9 x 3.9 mm, Pitch 1.27 mm", PackageReference=S8, PartNumber=LT1017IS8#PBF, Prop Delay (us)=22, RoHS=Y, Vos (mV) Guaranteed=1, Vos (mV) Typical=0.4, Vs Max (V)=40, Vs Min (V)=1.2
U3: library part CMP-0859-00252-3, "Single Inverter, DCK0005A, LARGE T&R", F @ Nom Voltage(Max)(Mhz)=150, Generic Part Number=SN74LVC1G04, ICC @ Nom Voltage(Max)(mA)=0.01, Manufacturer="Texas Instruments", Operating Temperature Range(C)="-40 to 125,-40 to 85", Rating=Catalog, tpd @ Nom Voltage(Max)(ns)=7.5,5.2,4.2,3.7, Voltage(Nom)(V)=1.8,2.5,3.3,5, 3-State Output=No, Bits(#)=1, DatasheetVersion=SCES214AD, Input Type=CMOS/TTL, Logic=Inverting, Output Drive (IOL/IOH)(Max)(mA)=32/-32, Output Type=CMOS, PackageReference=DCK0005A, Schmitt Trigger=No, Sub-Family="Inverting Buffer/Driver", Technology Family=LVC, VCC(Max)(V)=5.5, VCC(Min)(V)=1.65

## Nets (pads, with @x,y where several pads share a name; then routed paths per layer and width w, separated by ;. In a path a pad name is that pad's centre, name@x,y a point inside that pad or via, vN(x,y) a via of type N, cw(c..) or ccw(c..) an arc to the next point about the centre after c; other vN are vias at no path point)
5V: "J1 VCC 5V.1" "Trimmpoti 2.1" OP1.7 OP2.7 Q1.8 Q3.6 Q3.7 Q3.8 R2.1 R8.1 R24.2 R28.2 T4.3 T5.3 T6.3 T7.3 T8.3 T9.3 Trimmpoti.1 U1.6 U2.6 U4.6 U5.6 U6.6 U7.6 U8.6 U9.6
10sIntegrator: OP1.2 OP1.6 R30.1
500msIntegrator: OP2.2 OP2.6 R26.1
!BSPDaus: Q1.6 Q3.5
BP>30Bar: Q1.2 R12.2 T7.1 U5.7
BPShrtGND: Q2.4 R9.2 T6.1 U4.7
BrakeIn: "J4 BrakeIn.1" R11.1 U4.8
BSPDaus: D1.1 Q3.3 T8.1
BSPDpulse: Q2.10 Q3.1 T9.1
BSPDreset: Q1.3 R16.1 R18.1
CLKGateReset: Q2.12 R31.2 U9.7
CLKGateSet: Q2.11 R27.2 U3.2 U8.7
GND: "J2 GND.1" BP>30B.1 BPShrtGND.1 BSPDCLK.1 BSPDState.1 OP1.4 OP2.4 Q1.4 Q2.5 Q2.8 Q2.13 Q3.4 R1.2 R3.1 R7.2 R10.1 R15.1 R19.2 R22.2 R25.1 R29.1 T1.2 TPS>25%.1 TPSShrtGND.1 U1.2 U2.2 U4.2 U5.2 U6.1 U6.2 U7.1 U7.2 U8.2 U9.2
NetBP>30B_2: BP>30B.2 R35.2
NetBPShrtGND_2: BPShrtGND.2 R34.1
NetBSPDCLK_2: BSPDCLK.2 R37.1
NetBSPDState_2: BSPDState.2 R36.2
NetC1_1: C1.1 R17.2 T2.2 U6.7
NetC1_2: C1.2 OP1.3 R16.2 R17.1 U6.8
NetC2_1: C2.1 OP2.3 R20.2 R23.1 U7.8
NetC2_2: C2.2 R23.2 T3.2 U7.7
NetD1_2: D1.2 R13.1
NetQ1_5: Q1.5 U3.4
NetR1_1: R1.1 R2.2 R6.1 U1.1
NetR3_2: R3.2 Trimmpoti.2 U2.8
NetR4_2: R4.2 R5.1 U2.1
NetR7_1: R7.1 R8.2 R9.1 U4.1
NetR10_2: "Trimmpoti 2.2" R10.2 U5.8
NetR11_2: R11.2 R12.1 U5.1
NetR13_2: R13.2 T1.1
NetR14_1: R14.1 T1.3
NetR14_2: R14.2 Relay1.1
NetR15_2: R15.2 Relay1.2
NetR18_2: R18.2 T2.1
NetR19_1: R19.1 T2.3
NetR21_2: R21.2 T3.1
NetR22_1: R22.1 T3.3
NetR24_1: R24.1 R25.2 U8.8
NetR26_2: R26.2 R27.1 U8.1
NetR28_1: R28.1 R29.2 U9.8
NetR30_2: R30.2 R31.1 U9.1
NetR32_1: R32.1 TPSShrtGND.2
NetR32_2: R32.2 T4.2
NetR33_1: R33.1 T5.2
NetR33_2: R33.2 TPS>25%.2
NetR34_2: R34.2 T6.2
NetR35_1: R35.1 T7.2
NetR36_1: R36.1 T8.2
NetR37_2: R37.2 T9.2
SDBSPDin: J5SDin.1 Relay1.3
SDBSPDout: "J6 SDout.1" Relay1.4 Relay1.5
Sensorfoult: Q2.9 Q3.2 R20.1 R21.1
ShrtGNDdetection: Q2.1 Q2.6
TPS>25%: Q1.1 R5.2 T5.1 U2.7
TPSBPfoult: Q1.7 Q2.2
TPSin: "J3 TPSin.1" R4.1 U1.8
TPSShrtGND: Q2.3 R6.2 T4.1 U1.7
pads on no net: "Trimmpoti 2.3" OP1.1 OP1.5 OP1.8 OP2.1 OP2.5 OP2.8 Q2.7 Q2.14 Trimmpoti.3 U1.3 U1.4 U1.5 U2.3 U2.4 U2.5 U3.1 U3.3 U3.5 U4.3 U4.4 U4.5 U5.3 U5.4 U5.5 U6.3 U6.4 U6.5 U7.3 U7.4 U7.5 U8.3 U8.4 U8.5 U9.3 U9.4 U9.5